# EAGLE board ConnectionBoard (EAGLE 4.16)
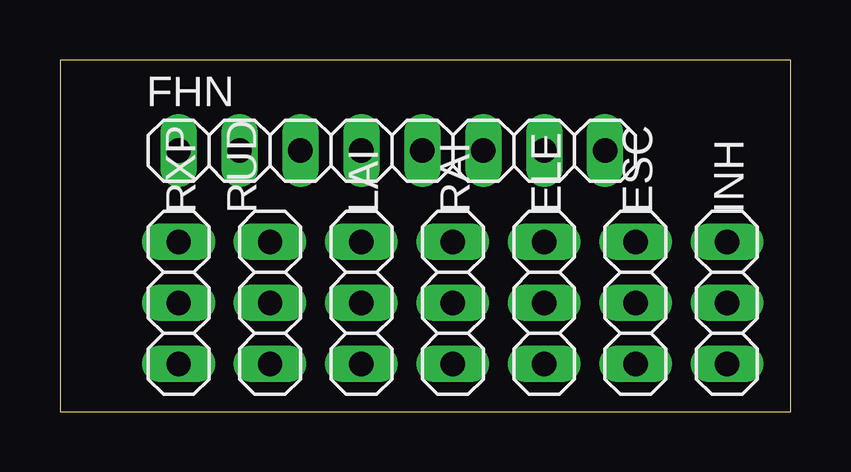
[diagram p0: board, top side]
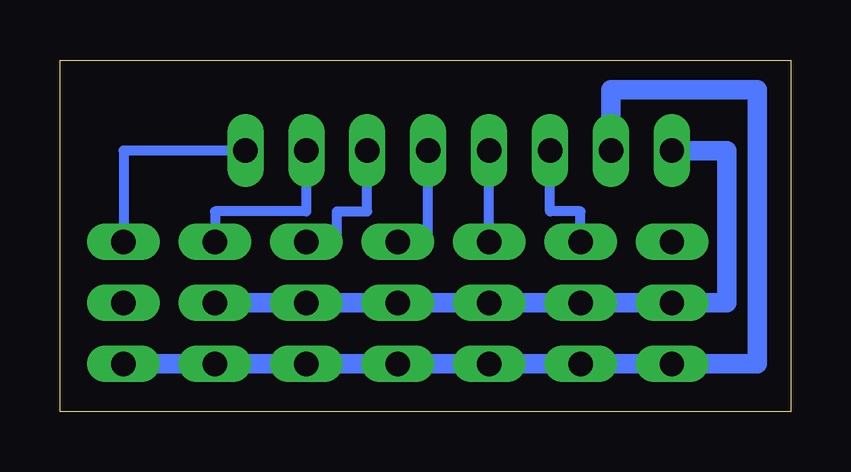
[diagram p1: board, bottom side, seen from below]

Size 30.46 x 14.66 mm. Coordinates in mm from the lower left corner, seen from the top.
Outline: 0,0 30.46,0 30.46,14.66 0,14.66 0,0
Copper layers (1*16): Top 0.035mm / dielectric 1.5mm / Bottom 0.035mm
Design rules "default": minimum track width 10mil, minimum drill 24mil, track to track 8mil, track to pad 8mil, pad to pad 8mil, via to via 8mil, smd to smd 8mil, copper to edge 40mil, drill to drill 8mil, minimum pad ring 10mil, minimum via ring 8mil, stop-mask expansion 4mil, vias tented up to drill 0mil, thermal gap 10mil

## Footprints (pad centres in the part's own frame; a part is rotated, then mirrored left to right if it is on the bottom)
1X03 = drill 1.016 long: 1 -2.54,0; 2 0,0; 3 2.54,0
1X08 = drill 1.016 long: 1 -8.89,0; 2 -6.35,0; 3 -3.81,0; 4 -1.27,0; 5 1.27,0; 6 3.81,0; 7 6.35,0; 8 8.89,0

## Placement (x,y rotation side)
ELE  [1X03]  20.19,4.53 90 top
ESC  [1X03]  24,4.53 90 top
FHN  [1X08]  13.84,10.88 0 top
INH  [1X03]  27.81,4.53 90 top
LAI  [1X03]  12.57,4.53 90 top
RAI  [1X03]  16.38,4.53 90 top
RUD  [1X03]  8.76,4.53 90 top
RXP  [1X03]  4.95,4.53 90 top

## Library data of the parts
ELE ESC FHN INH LAI RAI RUD RXP = pinhead

## Nets
5VESC: ELE.2 ESC.2 FHN.1 LAI.2 RAI.2 RUD.2 RXP.2
GND: ELE.1 ESC.1 FHN.2 INH.1 LAI.1 RAI.1 RUD.1 RXP.1
INHIBIT: FHN.8 INH.3
RCOUT_LA: FHN.4 LAI.3
RCOUT_LE: FHN.5 RAI.3
RCOUT_RA: ELE.3 FHN.6
RCOUT_RUD: FHN.3 RUD.3
RCOUT_THR: ESC.3 FHN.7

## Tracks (layer width: path | path; a pad name or v marks a point on that pad's centre or on a via)
5VESC
  Bottom 0.813: FHN.1 2.66,10.88 2.66,4.53 RXP.2 RUD.2 LAI.2 RAI.2 ELE.2 ESC.2
GND
  Bottom 0.813: FHN.2 7.49,13.42 1.39,13.42 1.39,1.99 RXP.1 RUD.1 LAI.1 RAI.1 ELE.1 ESC.1 INH.1
INHIBIT
  Bottom 0.406: FHN.8 27.81,10.88 INH.3
RCOUT_LA
  Bottom 0.406: LAI.3 FHN.4
RCOUT_LE
  Bottom 0.406: RAI.3 15.11,7.07 FHN.5
RCOUT_RA
  Bottom 0.406: ELE.3 18.92,7.07 18.92,8.34 17.65,8.34 FHN.6
RCOUT_RUD
  Bottom 0.406: RUD.3 8.76,8.34 10.03,8.34 FHN.3
RCOUT_THR
  Bottom 0.406: ESC.3 24,8.34 20.19,8.34 FHN.7